# Altium PCB PCB_SIM7670G.PcbDoc
Units mm, origin at the board's own origin, x right, y up, seen from the top; angles counter-clockwise.
Board outline 33 x 41 mm, 2 copper layers (Top Layer, Bottom Layer); 37 components, 28 nets, 210 pads, 89 vias.
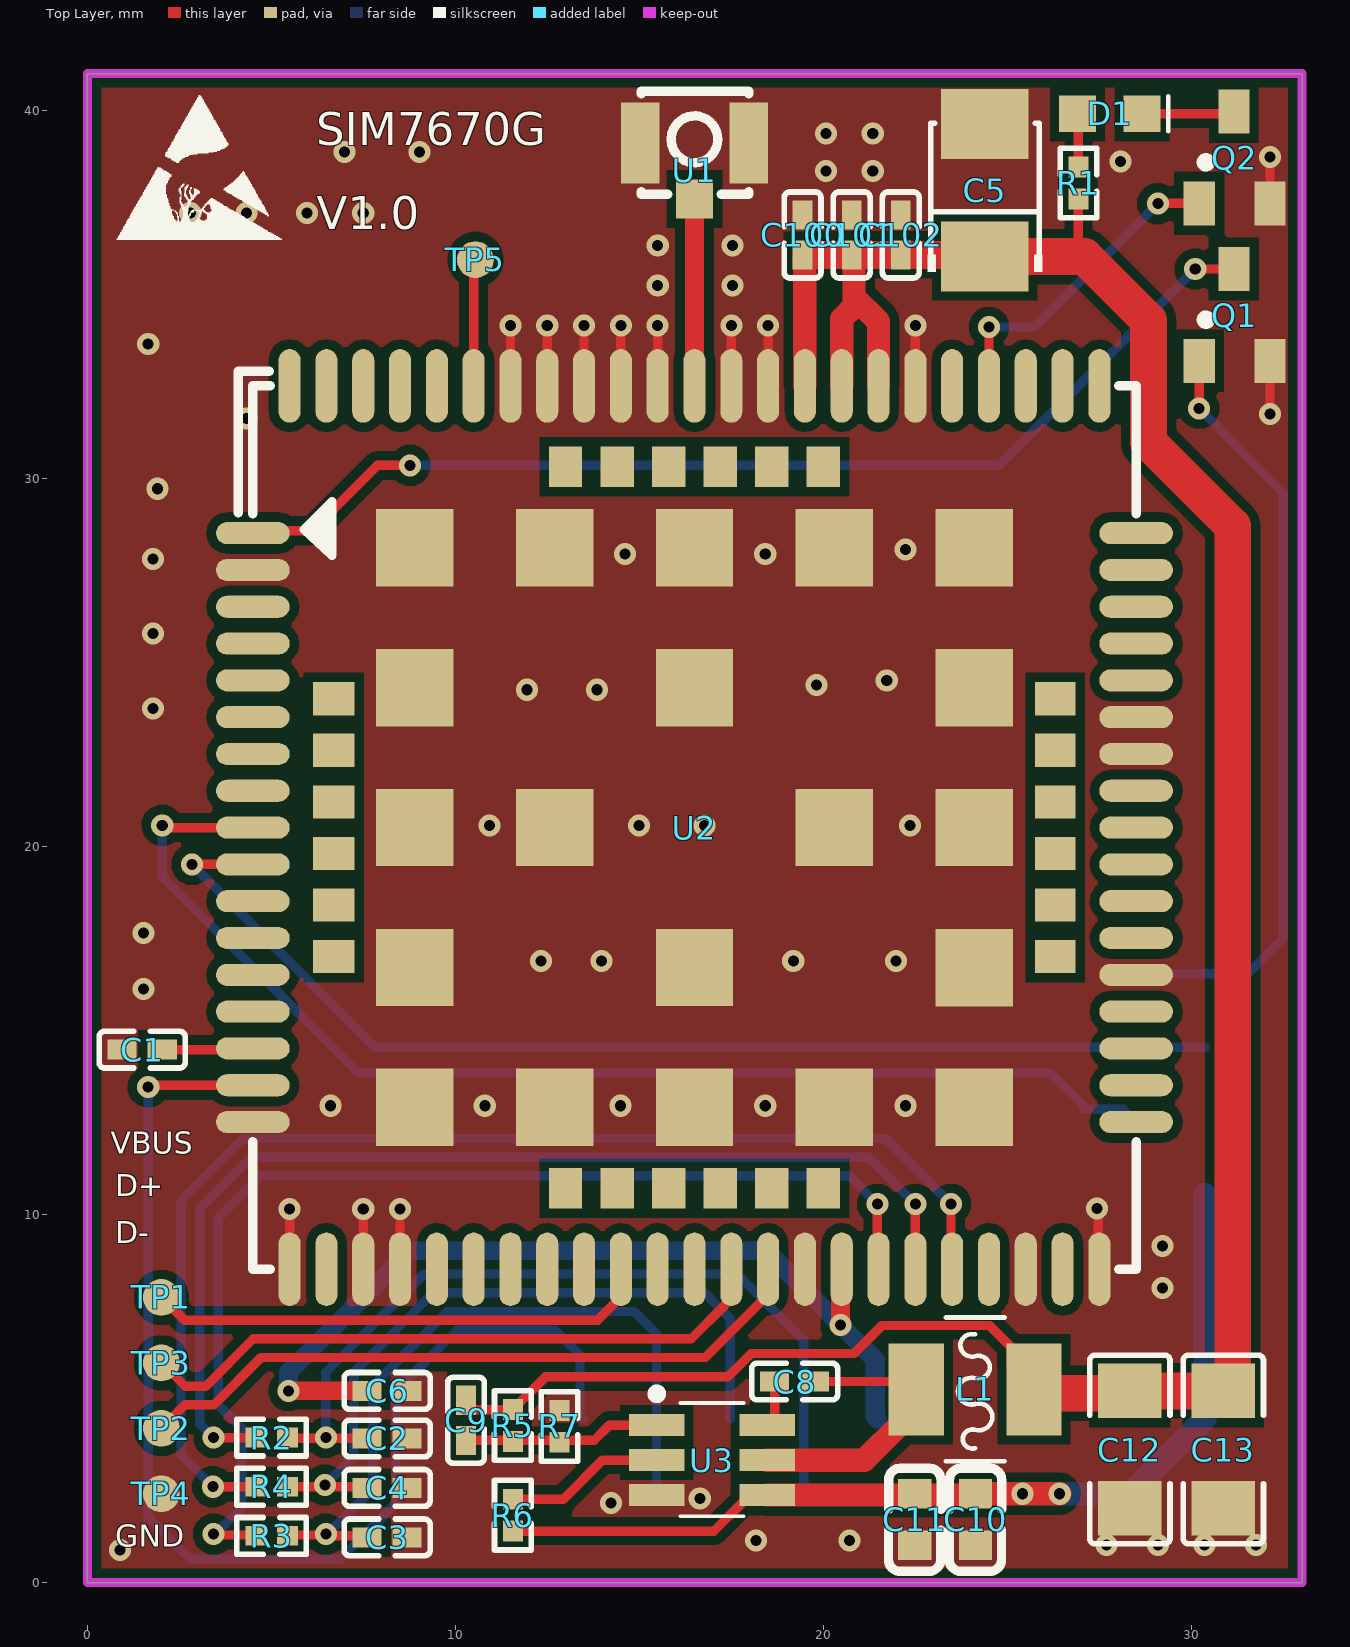
[diagram p0: Top Layer view]
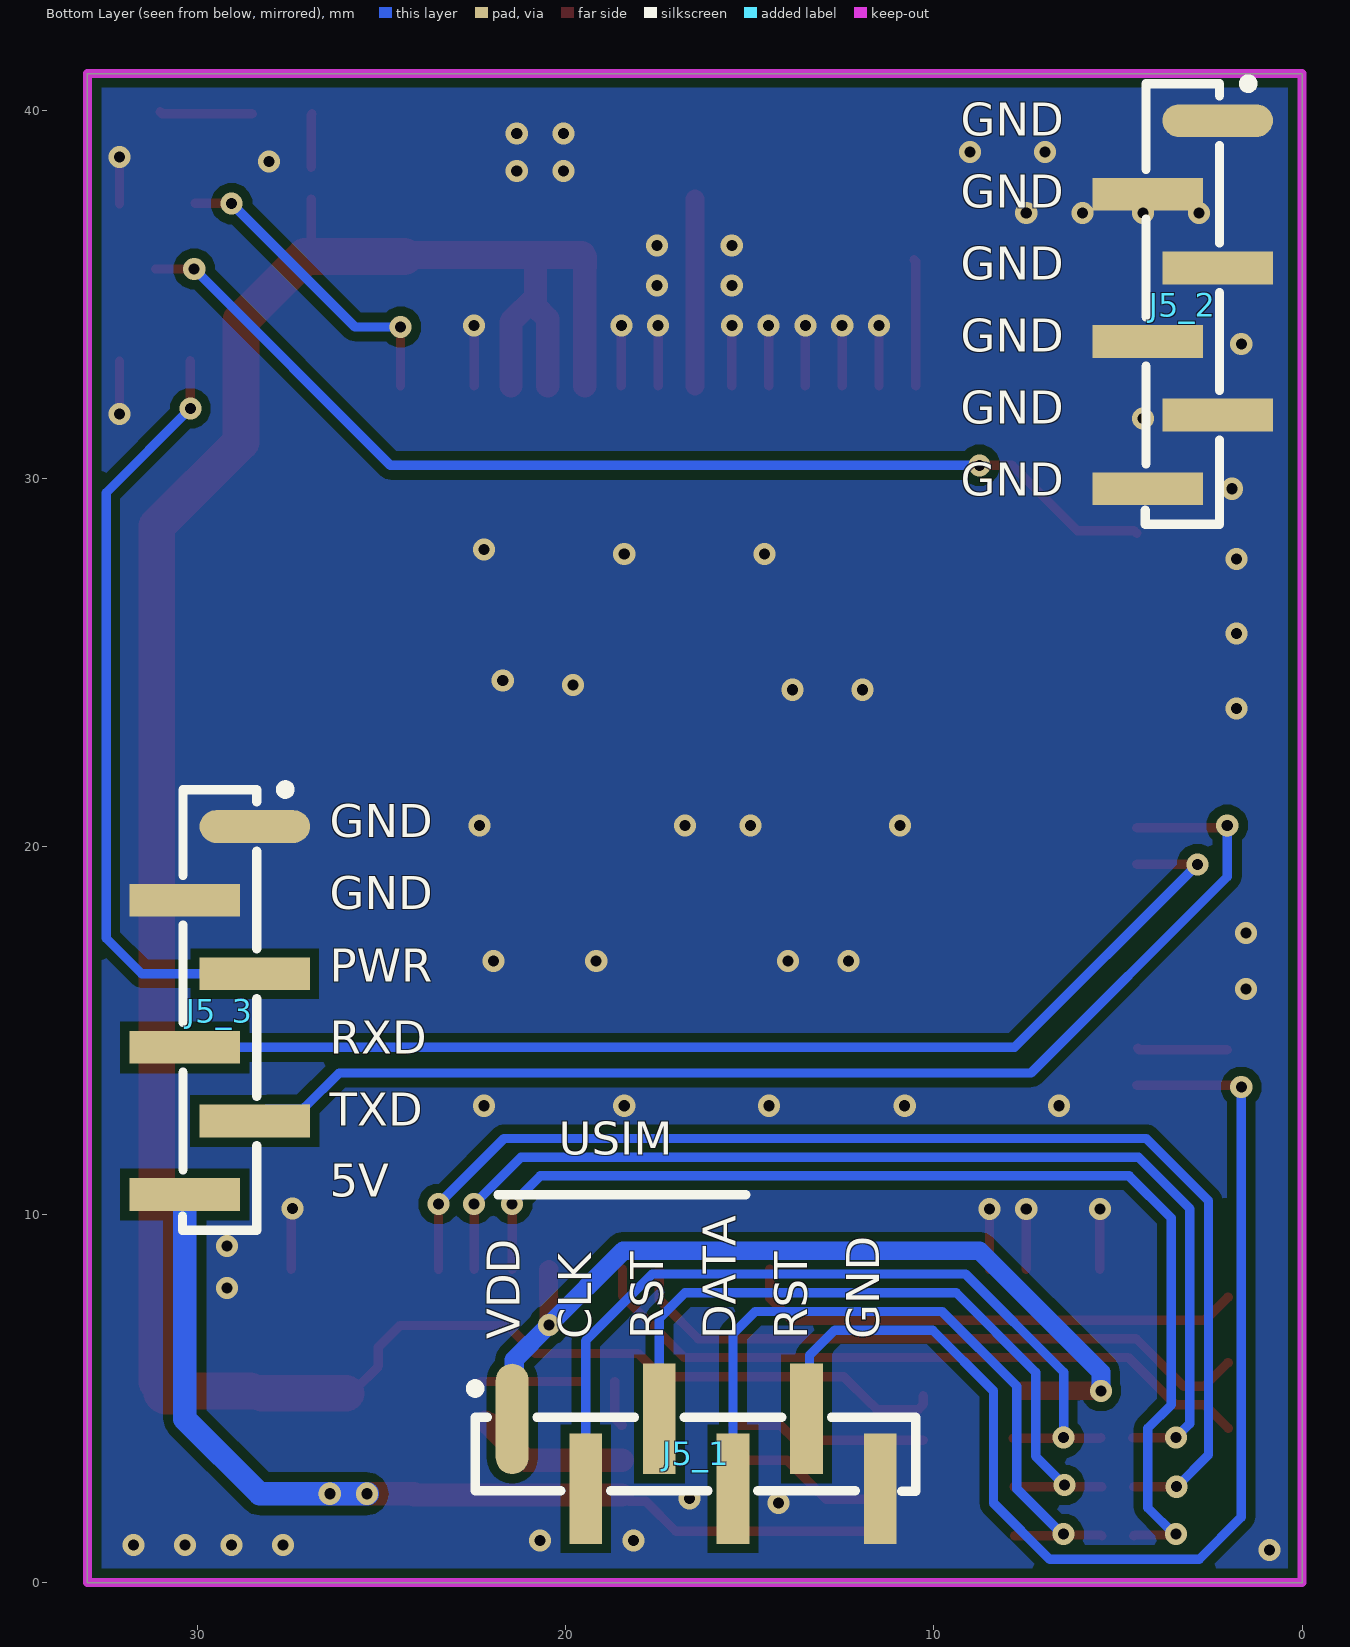
[diagram p1: Bottom Layer view, seen from below]
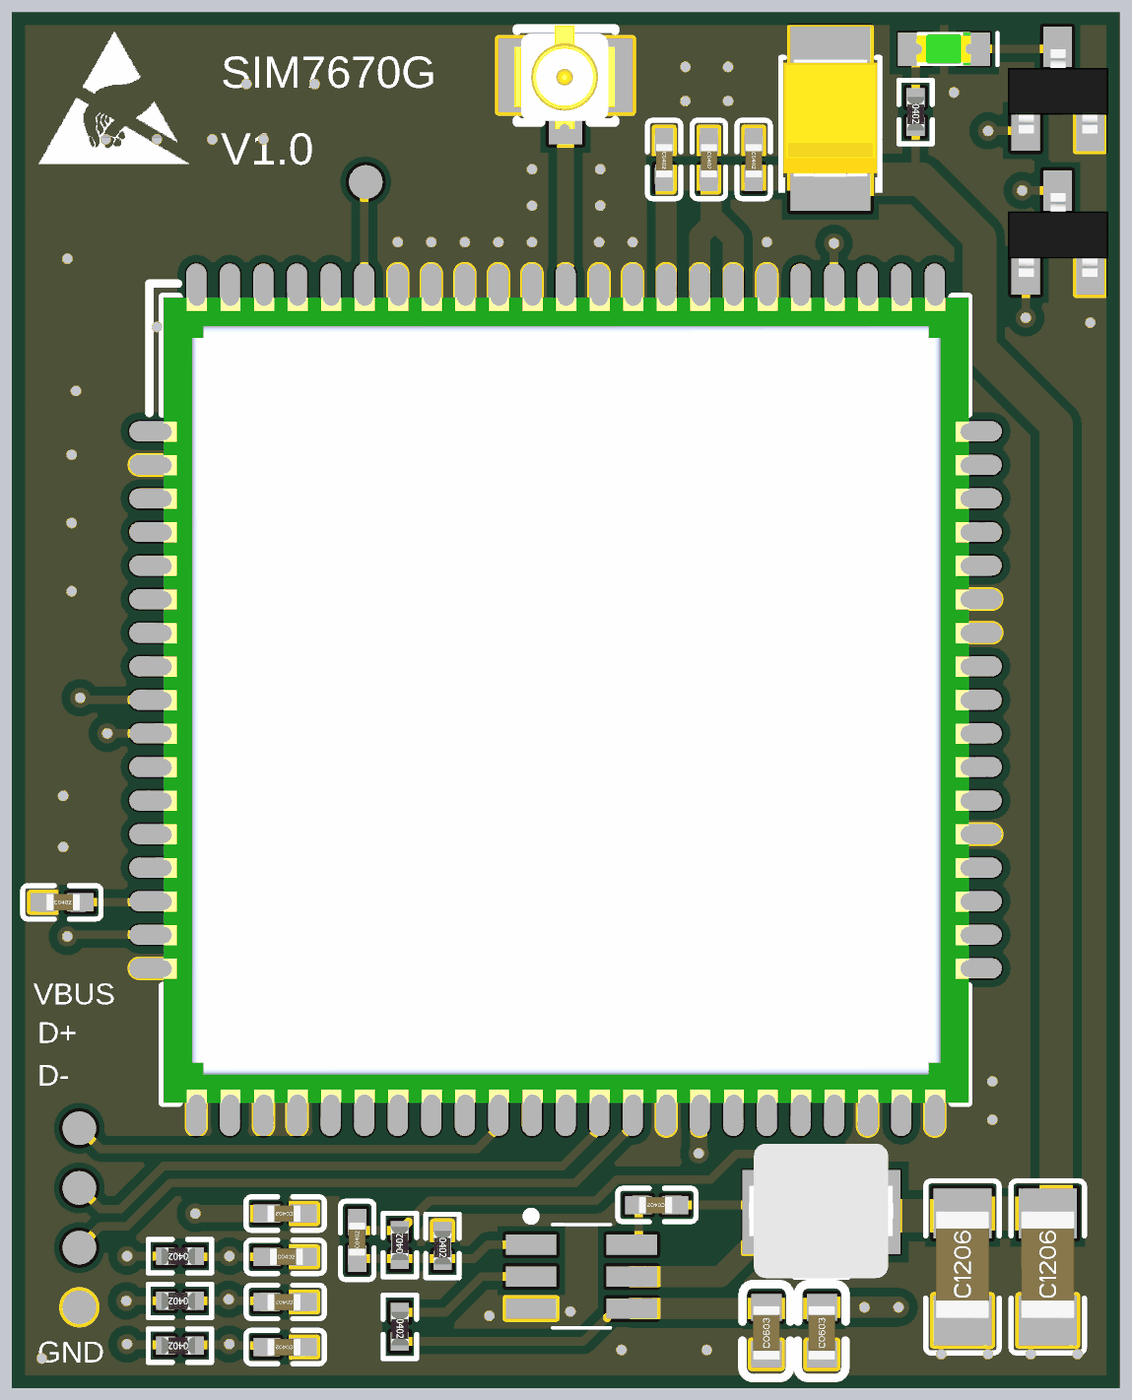
[diagram p2: 3D render of the assembled board from above, using the file's embedded part models]
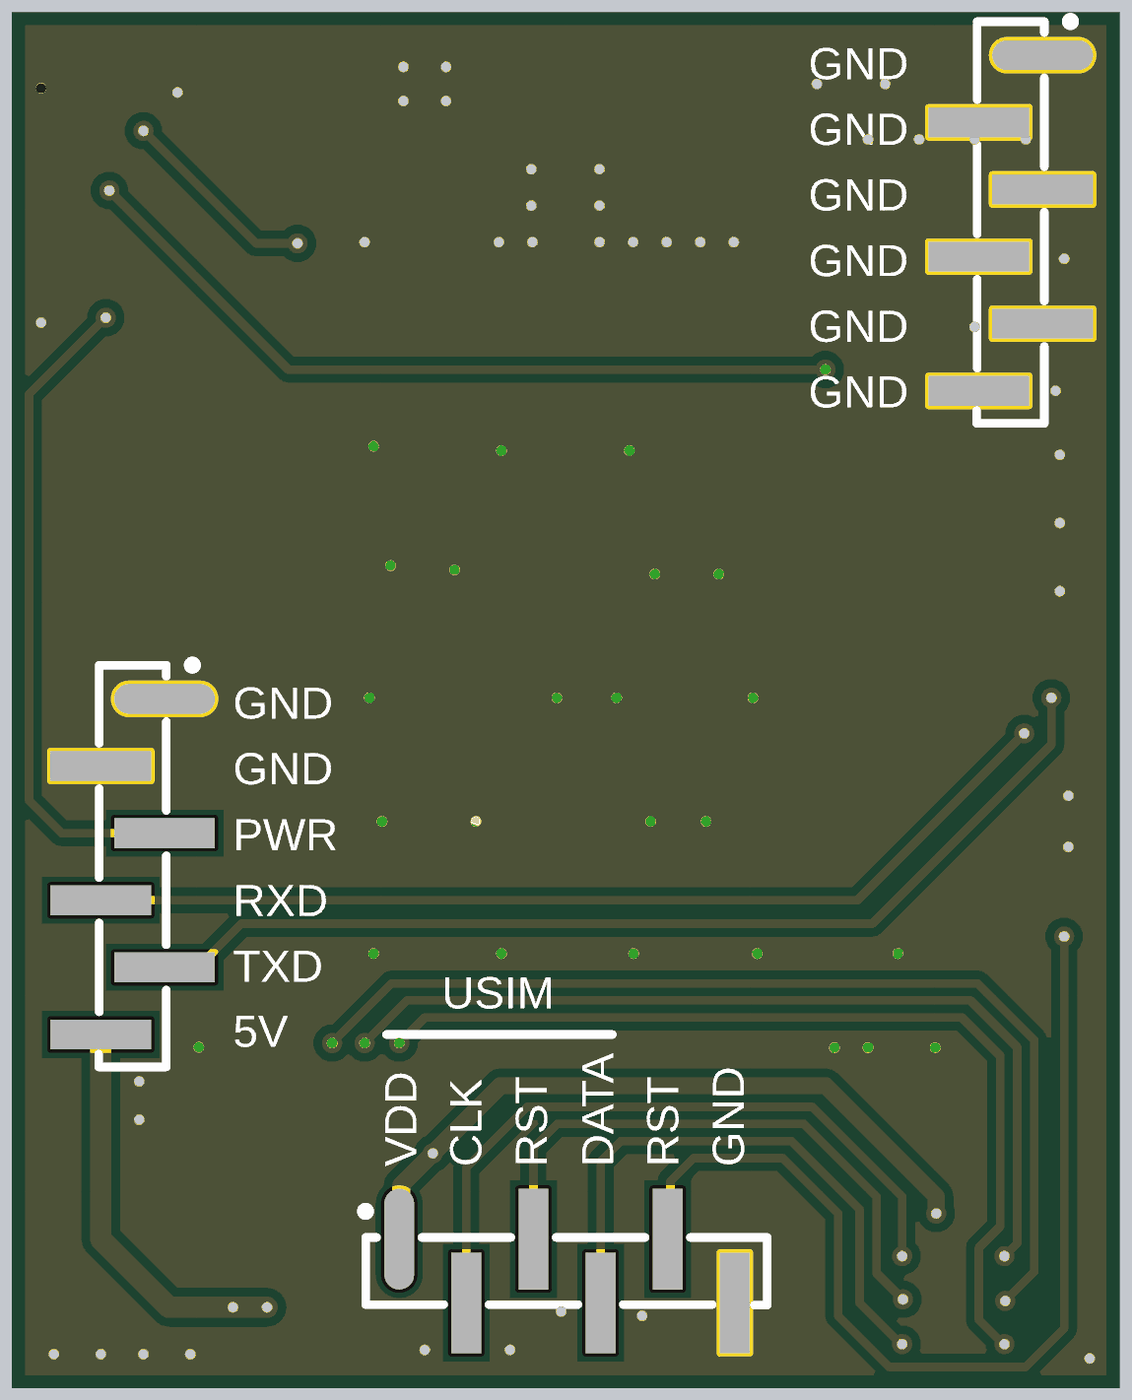
[diagram p3: 3D render of the assembled board from below, using the file's embedded part models]

## Layer stack, top to bottom
Top Solder: solder mask 0.0102, Solder Resist, Dk 3.5
Top Layer: signal copper 0.0356
Dielectric 1: dielectric 0.32, FR-4, Dk 4.8
Bottom Layer: signal copper 0.0356
Bottom Solder: solder mask 0.0102, Solder Resist, Dk 3.5

## Board outline
0,0 0,41 33,41 33,0

## Design rules (kind name [scope] priority, off if disabled: settings)
Clearance [All] p1: gap=0.254 ignorepadtopadclearanceinfootprint=FALSE except(0: Arc-Hole Track-Hole SMDPad-Hole THPad-Hole Via-Hole Fill-Hole Poly-Hole Region-Hole Text-Hole)
PolygonConnect [All] p1: connectstyle=Direct reliefconductorwidth=0.254 reliefentries=4 polygonreliefangle="90 Angle" airgapwidth=0.254
RoutingVias [All] p1: holewidth=0.3 width=0.6 viastyle="Through Hole" minholewidth=0.3 minwidth=0.6 maxholewidth=0.3 maxwidth=0.6
SolderMaskExpansion [All] p1: expansion=0.102 istentingtop=FALSE
Width [All] p1: maxlimit=1.27 minlimit=0.254 preferedwidth=0.635 minimp=50.000000 maximp=50.000000 favimp=50.000000
30 further rules are at their usual default settings.

## Components (designator, comment, footprint, x,y, rotation, side; value= is the part's Value field where it differs from the comment)
C1 "100nF" "CAP CERAMIC SMD 0402 TyPE 1005" 1.524,14.478 r0 top
C2 "22pF" "CAP CERAMIC SMD 0402 TyPE 1005" 8.179,3.916 r0 top
C3 "22pF" "CAP CERAMIC SMD 0402 TyPE 1005" 8.105,1.228 r180 top
C4 "22pF" "CAP CERAMIC SMD 0402 TyPE 1005" 8.105,2.572 r180 top
C5 "100uF 10V" "CAP TANTALUM SMD 3528-21 type B" 24.384,38.1 r90 top
C6 "100nF" "CAP CERAMIC SMD 0402 TyPE 1005" 8.105,5.207 r180 top
C8 "100nF" "CAP CERAMIC SMD 0402 TyPE 1005" 19.177,5.461 r180 top
C9 "100pF" "CAP CERAMIC SMD 0402 TyPE 1005" 10.287,4.445 r90 top
C10 "22uF/16V" "CAP CERAMIC SMD 0603 TyPE 1608" 24.13,1.778 r90 top
C11 "22uF/16V" "CAP CERAMIC SMD 0603 TyPE 1608" 22.479,1.778 r90 top
C12 "100uF/6.3V" "CAP CERAMIC SMD 1206 TyPE 3216" 28.321,3.683 r90 top
C13 "100uF/6.3V" "CAP CERAMIC SMD 1206 TyPE 3216" 30.861,3.683 r90 top
C100 "10pF" "CAP CERAMIC SMD 0402 TyPE 1005" 19.431,36.576 r270 top
C101 "33pF" "CAP CERAMIC SMD 0402 TyPE 1005" 20.764,36.576 r270 top
C102 "100nF" "CAP CERAMIC SMD 0402 TyPE 1005" 22.098,36.576 r270 top
D1 "LED" "LED SMD GREEN TYPE 0603" 27.813,39.878 r0 top
J5_1 "GSM_Connect" "CONNECTORS FEMALE HEADERS 1X6 2.0 TYPE STRAIGHT SMD" 13.486,-2.235 r90 bottom locked
J5_2 "GSM_Connect" "CONNECTORS FEMALE HEADERS 1X6 2.0 TYPE STRAIGHT SMD" 8.971,31.743 r180 bottom locked
J5_3 "GSM_Connect" "CONNECTORS FEMALE HEADERS 1X6 2.0 TYPE STRAIGHT SMD" 35.133,12.565 r180 bottom locked
L1 "4.7uH  0420" "INDUCTORS SMD 0420" 24.13,5.08 r0 top
Q1 "DTC143ZCA" SOT-23 32.162,33.111 r0 top
Q2 "DTC143ZCA" SOT-23 32.162,37.389 r0 top
R1 "5.6K" "RES CHIPS SMD 0402 TYPE 1005" 26.924,37.973 r270 top
R2 "22R" "RES CHIPS SMD 0402 TYPE 1005" 4.953,3.937 r180 top
R3 "22R" "RES CHIPS SMD 0402 TYPE 1005" 4.953,1.27 r180 top
R4 "22R" "RES CHIPS SMD 0402 TYPE 1005" 4.953,2.603 r180 top
R5 "110K" "RES CHIPS SMD 0402 TYPE 1005" 11.557,4.318 r90 top
R6 "10K" "RES CHIPS SMD 0402 TYPE 1005" 11.557,1.778 r270 top
R7 "18K" "RES CHIPS SMD 0402 TYPE 1005" 12.827,4.191 r270 top
TP1 "" "TEST POINT 4" 2.032,7.747 r90 top
TP2 "" "TEST POINT 4" 2.032,4.191 r90 top
TP3 "" "TEST POINT 4" 2.032,5.969 r90 top
TP4 "" "TEST POINT 4" 2.032,2.413 r90 top
TP5 "" "TEST POINT 4" 10.566,35.941 r90 top
U1 "" "CONNECTORS RF SMD TYPE IPEX" 16.517,39.218 r180 top
U2 "A7670G-LABE" "Modules SIM7670G" 15.914,20.085 r0 top locked
U3 "SY8105IADC" SOT-23-6 16.891,3.302 r0 top

## Footprints (in the part's own frame and the unit in brackets; to place one, negate y for a bottom-side part, rotate by r counter-clockwise, add the part's x,y. Pads: shape width x height; smd on the part's side, far side on the other; paste and mask are expansions set on the pad)
"CAP CERAMIC SMD 0402 TyPE 1005" [mm]
  rect 0.79x0.54 smd: 1(-0.582,0) 2(0.508,0)
  silkscreen extent -1.21,-0.5 1.13,0.5, body extent -0.5,-0.25 0.5,0.25, height 0.5
"CAP CERAMIC SMD 0603 TyPE 1608" [mm]
  rect 0.8x0.9 smd: 1(-0.765,0) 2(0.635,0)
  silkscreen extent -1.47,-0.71 1.33,0.72, body extent -0.93,-0.4 0.67,0.4, height 0.8
"CAP CERAMIC SMD 1206 TyPE 3216" [mm]
  rect 1.485x1.728 smd: 1(-1.661,0) 2(1.524,0)
  silkscreen extent -2.63,-1.09 2.5,1.09, body extent -1.6,-0.8 1.6,0.8, height 1.27
"CAP TANTALUM SMD 3528-21 type B" [mm]
  rect 1.9x2.376 smd: 1(-2.073,0) 2(1.524,0)
  silkscreen extent -2.48,-1.55 1.55,1.55, body extent -2,-1.4 1.5,1.4, height 1.91
"CONNECTORS FEMALE HEADERS 1X6 2.0 TYPE STRAIGHT SMD" [mm]
  oval 3x0.89 smd: 1(6.68,7.976)
  rect 3x0.89 smd: 2(4.78,5.976) 3(6.68,3.976) 4(4.78,1.976) 5(6.68,-0.024) 6(4.78,-2.024)
  silkscreen extent 4.71,-2.99 7.64,9.11, body extent 2.94,-3.01 8.44,8.99, height 4
"CONNECTORS RF SMD TYPE IPEX" [mm]
  rect 1x1.05 smd: 1(0.024,1.627)
  rect 1.05x2.2 smd: 2(-1.451,0.102) 3(1.499,0.102)
  silkscreen extent -1.45,-1.3 1.47,1.5, body extent -1.45,-1.4 1.55,1.7, height 1.25
"INDUCTORS SMD 0420" [mm]
  rect 1.5x2.5 smd paste+0 mask+0.051: 1(-1.612,0.17) 2(1.588,0.17)
  silkscreen extent -0.81,-1.78 0.79,2.12, body extent -2.18,-1.8 2.12,2.2, height 2.2
"LED SMD GREEN TYPE 0603" [mil]
  rect 39.3x39.3 smd paste+0 mask+2: 1(-36,1) 2(33,1)
  silkscreen extent 61,-18 61,20, body extent -34,-19 30,21, height 38
"Modules SIM7670G" [mm]
  oval 2x0.6 smd paste-100 mask+0.05: 1(-11.421,8.427) 2(-11.421,7.427) 3(-11.421,6.427) 4(-11.421,5.427) 5(-11.421,4.427) 6(-11.421,3.427) 7(-11.421,2.427) 8(-11.421,1.427) 9(-11.421,0.427) 10(-11.421,-0.573) 11(-11.421,-1.573) 12(-11.421,-2.573) 13(-11.421,-3.573) 14(-11.421,-4.573) 15(-11.421,-5.573) 16(-11.421,-6.573) 17(-11.421,-7.573) 35(12.579,-7.573) 36(12.579,-6.573) 37(12.579,-5.573) 38(12.579,-4.573) 39(12.579,-3.573) 40(12.579,-2.573) 41(12.579,-1.573) 42(12.579,-0.573) 43(12.579,0.427) 44(12.579,1.427) 45(12.579,2.427) 46(12.579,3.427) 47(12.579,4.427) 48(12.579,5.427) 49(12.579,6.427) 50(12.579,7.427) 51(12.579,8.427)
  oval 0.6x2 smd paste-100 mask+0.05: 18(-7.421,-11.573) 19(-6.421,-11.573) 20(-5.421,-11.573) 21(-4.421,-11.573) 22(-3.421,-11.573) 23(-2.421,-11.573) 24(-1.421,-11.573) 25(-0.421,-11.573) 26(0.579,-11.573) 27(1.579,-11.573) 28(2.579,-11.573) 29(3.579,-11.573) 30(4.579,-11.573) 31(5.579,-11.573) 32(6.579,-11.573) 33(7.579,-11.573) 34(8.579,-11.573) 52(8.579,12.427) 53(7.579,12.427) 54(6.579,12.427) 55(5.579,12.427) 56(4.579,12.427) 57(3.579,12.427) 58(2.579,12.427) 59(1.579,12.427) 60(0.579,12.427) 61(-0.421,12.427) 62(-1.421,12.427) 63(-2.421,12.427) 64(-3.421,12.427) 65(-4.421,12.427) 66(-5.421,12.427) 67(-6.421,12.427) 68(-7.421,12.427) 89(-10.421,-11.573) 90(-9.421,-11.573) 91(-8.421,-11.573) 92(9.579,-11.573) 93(10.579,-11.573) 94(11.579,-11.573) 95(11.579,12.427) 96(10.579,12.427) 97(9.579,12.427) 98(-8.421,12.427) 99(-9.421,12.427) 100(-10.421,12.427)
  rect 2.1x2.1 smd paste-100 mask+0.05: 69(-7.021,8.027) 70(-7.021,4.227) 71(-7.021,0.427) 72(-7.021,-3.373) 73(-7.021,-7.173) 74(-3.221,-7.173) 75(0.579,-7.173) 76(4.379,-7.173) 77(8.179,-7.173) 78(8.179,-3.383) 79(8.179,0.427) 80(8.179,4.227) 81(8.179,8.027) 82(4.379,8.027) 83(0.579,8.027) 84(-3.221,8.027) 85(-3.221,0.427) 86(0.579,-3.373) 87(4.379,0.427) 88(0.579,4.227)
  rect 1.12x0.9 smd paste-100 mask+0.05: 101(-9.221,3.927) 102(-9.221,2.527) 103(-9.221,1.127) 104(-9.221,-0.273) 105(-9.221,-1.673) 106(-9.221,-3.073)
  rect 0.9x1.1 smd paste-100 mask+0.05: 107(-2.92,-9.373) 108(-1.521,-9.373) 109(-0.121,-9.373) 110(1.279,-9.373) 111(2.679,-9.373) 112(4.079,-9.373) 119(4.079,10.227) 120(2.679,10.227) 121(1.279,10.227) 122(-0.121,10.227) 123(-1.521,10.227) 124(-2.92,10.227)
  rect 1.1x0.9 smd paste-100 mask+0.05: 113(10.379,-3.073) 114(10.379,-1.673) 115(10.379,-0.273) 116(10.379,1.127) 117(10.379,2.527) 118(10.379,3.927)
  silkscreen extent -11.82,-11.57 12.58,12.83, body extent -11.4,-11.58 12.6,12.42, height 2.6
"RES CHIPS SMD 0402 TYPE 1005" [mm]
  rect 0.566x0.54 smd: 1(-0.485,0) 2(0.381,0)
  silkscreen extent -1,-0.5 0.89,0.5, body extent -0.5,-0.25 0.5,0.25, height 0.36
SOT-23 [mm]
  rect 0.85x1.2 smd: 1(-1.956,0.082) 2(-0.031,0.076) 3(-1.011,2.576)
  silkscreen extent -1.9,1.07 -1.65,1.32, body extent -2.49,0 0.51,2.5, height 1.06
SOT-23-6 [mm]
  rect 1.5x0.6 smd: 1(-1.424,0.975) 2(-1.424,0.025) 3(-1.424,-0.925) 4(1.576,-0.925) 5(1.576,0.025) 6(1.576,0.975)
  silkscreen extent -1.55,-1.5 0.94,1.95, body extent -1.68,-1.5 1.83,1.55, height 1.45
"TEST POINT 4" [mm]
  round 1 smd: 0(0,0.025)

## Part data
C1 C2 C3 C4 C6 C8 C9 C10 C11 C12 C13 C100 C101 C102: library part CAP104-100nF-50V, "Capacitor", 104=100nF
C5: library part "CAP ALU HOLD", "Aluminum Electrolytic Capacitors - Leaded ROHS", BOM_JLCPCB Part Class="Extended Part", BOM_Manufacturer=AISHI(艾华集团), BOM_Manufacturer Part=ERR1VM102G20OT, BOM_Supplier=LCSC, BOM_Supplier Part=C398835, Contributor=LCSC, nameAlias=Capacitance, spicePre=C, spiceSymbolName=ERR1VM102G20OT
D1: library part "LED SMD 0805", "Emerald 0805 Light Emitting Diodes (LED) ROHS", Supplier 1=RSComponents
J5_1 J5_2 J5_3: library part "JP 1x6 2.54 Duc Thang", "Cắm", Chung_Loai=Cắm, Don_Vi=Con, Ma_Hang=MH000903, Ten_Linh_Kien="Jump Đơn Đực 2.54MM 1x40P Thẳng 11MM"
L1: library part "INDUCTORS SMD", BOM_JLCPCB Part Class="Extended Part", BOM_Manufacturer=Yanchuang(研创), BOM_Manufacturer Part=SCHF160808H47NJT, BOM_Supplier=LCSC, BOM_Supplier Part=C578001, Contributor=LCSC, nameAlias=Inductance, spicePre=L, spiceSymbolName=SCHF160808H47NJT
Q1 Q2: library part "TRANSISTOR SMD NPN", "SOT-23 Bipolar Transistors npn - BJT ROHS", BOM_Manufacturer=晶扬电子, BOM_Manufacturer Part=MMBT3904, BOM_Supplier=LCSC, BOM_Supplier Part=C5156716, Contributor=lcsc, link=https://atta.szlcsc.com/upload/public/pdf/source/20220916/F7F78DEEB551E1B14C8EDDE9CBB3CED9.pdf, spicePre=Q, spiceSymbolName=MMBT3904_C5156716
R1 R2 R3 R4 R5 R6 R7: library part "RES 0603 1%_", "±1% - Chip Resistor - Surface Mount ROHS", Chung_Loai=Dán, Don_Vi=Con, Ma_Hang=MH005880, So_Chan=2
TP1 TP2 TP3 TP4 TP5: library part "TEST POINT", "Test Point", Solder=NF
U1: library part "CONNECTORS RF SMD", "SMD RF Connectors / Coaxial Connectors ROHS", BOM_JLCPCB Part Class="Extended Part", BOM_Manufacturer="SHOU HAN(首韩)", BOM_Manufacturer Part="IPEX1-TXZ 142", BOM_Supplier=LCSC, BOM_Supplier Part=C3151745, Contributor=lcsc, link=https://atta.szlcsc.com/upload/public/pdf/source/20220627/A0C2EF411B6F3EC53ED1A4F491E26EB6.pdf, spicePre=U, spiceSymbolName="IPEX1-TXZ 142"
U2: library part "MODULES SIM A7670G-LABE", JLCPCB Part Class="Extended Part", Manufacturer=SIMCOM(芯讯通无线科技), Add into BOM=yes, Convert to PCB=yes, Datasheet=https://atta.szlcsc.com/upload/public/pdf/source/20240607/B50C584620D03E126C7F7E827627A461.pdf, Device=A7670G-LABE, LCSC Part Name=A7670G-LABE, Manufacturer Part=A7670G-LABE, Supplier=LCSC, Supplier Footprint=SMD,24x24mm, Supplier Part=C22462360, Symbol=A7670G-LABE
U3: Input Voltage=4.5V~18V, JLCPCB Part Class="Extended Part", LCSC Part Name="高效率快速响应5.0A 18V输入同步降压调节器", Manufacturer=silergy(矽力杰), Operating Temperature=-40℃~+125℃, Output Current=-, Quiescent Current (Iq)=250uA, Switching Frequency=500kHz, Add into BOM=yes, Convert to PCB=yes, Datasheet=https://atta.szlcsc.com/upload/public/pdf/source/20220309/7BF3C8E5C307C2252A511902A6824332.pdf, Device=SY8105IADC, Function="Step-down type", Manufacturer Part=SY8105IADC, Number of Outputs=1, Output Type=-, Output Voltage=-, Supplier=LCSC, Supplier Footprint=TSOT-23-6, Supplier Part=C2981547, Switch tube (built-in/external)=Built-in, Symbol=SY8105IADC, Synchronous Rectification=Yes, Topology=Step-down

## Via types
v1: diameter 0.6, hole 0.3, Top Layer to Bottom Layer, tented both sides, 89 vias

## Nets (pads, with @x,y where several pads share a name; then routed paths per layer and width w, separated by ;. In a path a pad name is that pad's centre, name@x,y a point inside that pad or via, vN(x,y) a via of type N, cw(c..) or ccw(c..) an arc to the next point about the centre after c; other vN are vias at no path point)
5VDC: C10.2 C11.2 J5_3.6 R6.2 U3.4 | length 27.2
  Top Layer w0.254: R6.2 17.018,1.397 17.825,2.204 18.294,2.204 U3.4
  Top Layer w0.635: U3.4 C10.2@24.13,2.377 ; C10.2 v1(25.4,2.413) v1(26.416,2.413)
  Bottom Layer w0.635: v1(25.4,2.413) v1(26.416,2.413) 28.321,2.413 30.353,4.445 J5_3.6
GND: C1.1 C2.2 C3.1 C4.1 C5.2 C6.1 C10.1 C11.1 C12.1 C13.1 C100.1 C101.1 C102.1 J5_1.6 J5_2.1 J5_2.2 J5_2.3 J5_2.4 J5_2.5 J5_2.6 J5_3.1 J5_3.2 Q1.2 Q2.2 R7.1 TP4.0 U1.2 U1.3 U2.2 U2.17 U2.18 U2.29 U2.39 U2.45 U2.46 U2.54 U2.58 U2.59 U2.61 U2.62 U2.63 U2.64 U2.65 U2.69 U2.70 U2.71 U2.72 U2.73 U2.74 U2.75 U2.76 U2.77 U2.78 U2.79 U2.80 U2.81 U2.82 U2.83 U2.84 U2.85 U2.86 U2.87 U2.88 U2.89 U2.91 U2.92 U2.94 U3.3 | length 21.7
  Top Layer w0.254: U2.89 v1(5.493,10.149) ; U2.91 v1(7.493,10.149) ; U2.18 v1(8.493,10.149) ; v1@11.43,34.212 v1(11.493,34.149) U2.65 ; U2.64 v1@12.493,33.989 ; U2.63 v1@13.493,33.878 ; U2.62 v1@14.493,34.021 ; U2.61 v1@15.493,34.035 ; U2.59 v1@17.493,34.13 ; U2.58 v1@18.493,34.085 ; U2.54 v1(22.493,34.149) ; v1(27.432,10.16) 27.461,10.131 U2.94@27.461,8.512 ; v1(32.131,31.75) Q1.2 ; Q2.2 v1(32.131,38.735)
  other v1: 0.889,0.889 27.686,1.016 29.083,1.016 30.353,1.016 31.75,1.016 18.161,1.143 20.701,1.143 14.224,2.159 16.637,2.286 29.21,8.001 29.21,9.144 6.604,12.954 10.795,12.954 14.478,12.954 18.415,12.954 22.225,12.954 1.524,16.129 12.319,16.891 13.97,16.891 19.177,16.891 21.971,16.891 1.524,17.653 10.922,20.574 14.986,20.574 16.764,20.574 22.352,20.574 1.778,23.749 11.938,24.257 13.843,24.257 19.812,24.384 21.717,24.511 1.778,25.781 1.778,27.813 14.605,27.94 18.415,27.94 22.225,28.067 1.905,29.718 4.318,31.623 1.651,33.655 12.493,34.149 13.493,34.149 14.493,34.149 15.493,34.149 17.493,34.149 18.493,34.149 15.494,35.236 17.526,35.236 15.494,36.322 17.526,36.322 2.794,37.211 4.318,37.211 5.969,37.211 7.493,37.211 20.066,38.354 21.336,38.354 28.067,38.608 6.985,38.862 9.017,38.862 20.066,39.37 21.336,39.37
IO27_GSM_PWRKEY: J5_3.3 Q1.1 | length 21.1
  Top Layer w0.254: v1(30.206,31.897) Q1.1
  Bottom Layer w0.254: J5_3.3 31.527,16.541 32.492,17.506 32.492,29.611 v1(30.206,31.897)
NetC8_1: C8.1 L1.1 U3.5 | length 7.2
  Top Layer w0.254: C8.1@19.632,5.461 22.306,5.461 L1.1
  Top Layer w0.508: L1.1@22.085,4.305 22.085,4.317 22.186,4.417 L1.1@22.197,4.417
  Top Layer w0.635: U3.5 21.107,3.327 L1.1@22.085,4.305
NetC8_2: C8.2 U3.6 | length 1.3
  Top Layer w0.254: U3.6 18.496,4.277 18.669,4.45 C8.2
NetC9_1: C9.1 R5.1 R7.2 U3.1 | length 5.4
  Top Layer w0.254: C9.1 11.557,3.863 12.827,3.863 13.769,3.863 14.183,4.277 U3.1
NetD1_1: D1.1 R1.1 | length 1.5
  Top Layer w0.254: D1.1 26.924,39.878 R1.1
NetD1_2: D1.2 Q2.3 | length 2.5
  Top Layer w0.254: D1.2@28.524,39.903 30.962,39.903 Q2.3@31.024,39.965
NetR6_1: R6.1 U3.2 | length 4.4
  Top Layer w0.254: R6.1 12.931,2.263 13.995,3.327 U3.2
NetU1_1: U1.1 U2.60 | length 5.1
  Top Layer w0.508: U2.60 U1.1
"SIM NETLIGHT": Q2.1 U2.52 | length 8.6
  Top Layer w0.254: U2.52 v1(24.493,34.113) ; v1(29.083,37.465) 29.088,37.47 Q2.1@30.079,37.47
  Bottom Layer w0.254: v1(24.493,34.113) 25.731,34.113 v1(29.083,37.465)
"SIM PWRKEY": Q1.3 U2.1 | length 29.6
  Top Layer w0.254: U2.1 4.559,28.578 6.099,28.578 7.874,30.353 v1(8.763,30.353) ; v1(30.099,35.687) Q1.3
  Bottom Layer w0.254: v1(8.763,30.353) 24.765,30.353 v1(30.099,35.687)
"SIM RESET": J5_1.5 U2.16 | length 33.2
  Top Layer w0.254: v1(1.651,13.462) 1.701,13.512 U2.16
  Bottom Layer w0.254: v1(1.651,13.462) 1.651,1.778 2.794,0.635 6.858,0.635 8.382,2.159 8.382,5.207 10.033,6.858 12.7,6.858 13.381,6.177 13.381,4.526 J5_1.5
"SIM RXD": J5_3.4 U2.10 | length 31.2
  Top Layer w0.254: v1(2.84,19.512) U2.10
  Bottom Layer w0.254: v1(2.84,19.512) 7.811,14.541 J5_3.4
"SIM STATUS": TP5.0 U2.66 | length 3.4
  Top Layer w0.254: U2.66 10.493,35.893 TP5.0
"SIM TXD": J5_3.5 U2.9 | length 33.1
  Top Layer w0.254: v1(2.032,20.574) 2.094,20.512 U2.9
  Bottom Layer w0.254: v1(2.032,20.574) 2.032,19.177 7.366,13.843 26.162,13.843 27.08,12.925 27.08,12.859 28.135,12.859 J5_3.5
"SIM VDD EXIT": C1.2 U2.15 | length 2.4
  Top Layer w0.254: C1.2 4.427,14.478 U2.15@4.461,14.512
SIM_CLK: C2.1 J5_1.2 R2.1 | length 23.1
  Top Layer w0.254: R2.1@5.461,3.937 5.482,3.916 6.456,3.916 v1(6.477,3.937) 6.498,3.916 C2.1 C2.1@7.851,3.916
  Bottom Layer w0.254: v1(6.477,3.937) 6.477,5.715 9.144,8.382 17.653,8.382 19.462,6.573 J5_1.2
SIM_DATA: C3.2 J5_1.4 R3.1 | length 20
  Top Layer w0.254: R3.1 5.461,1.293 6.454,1.293 v1(6.477,1.316) ; v1@6.477,1.27 C3.2@7.808,1.27
  Bottom Layer w0.254: v1(6.477,1.316) 6.523,1.316 7.747,2.54 7.747,5.334 9.779,7.366 14.859,7.366 15.462,6.763 J5_1.4
SIM_RST: C4.2 J5_1.3 R4.1 | length 19.8
  Top Layer w0.254: R4.1 v1@6.408,2.603 ; v1@6.5,2.603 C4.2@7.827,2.603
  Bottom Layer w0.254: v1(6.454,2.649) 6.459,2.649 7.239,3.429 7.239,5.715 9.398,7.874 15.875,7.874 16.764,7.874 17.462,7.176 J5_1.3
USB_DN: TP2.0 U2.28 | length 18.7
  Top Layer w0.254: TP2.0 2.642,4.826 3.429,4.826 4.718,6.115 16.783,6.115 18.461,7.793 U2.28@18.461,8.512
USB_DP: TP3.0 U2.27 | length 17.5
  Top Layer w0.254: TP3.0 2.02,5.969 2.655,5.334 3.219,5.334 4.508,6.623 16.402,6.623 17.32,7.541 17.32,7.545 17.461,7.686 U2.27@17.461,8.512
"USIM CLK": R2.2 U2.32 | length 29.8
  Top Layer w0.254: v1(3.429,3.937) R2.2 R2.2@4.595,3.937 ; U2.32 v1@22.493,10.253
  Bottom Layer w0.254: v1(3.429,3.937) 3.048,4.318 3.048,10.16 4.445,11.557 21.221,11.557 v1(22.493,10.285)
"USIM DATA": R3.2 U2.31 | length 30.8
  Top Layer w0.254: v1(3.429,1.316) 3.452,1.293 4.549,1.293 R3.2 ; U2.31@21.461,8.512 v1(21.461,10.285)
  Bottom Layer w0.254: v1(3.429,1.316) 3.475,1.316 4.191,2.032 4.191,4.191 3.556,4.826 3.556,9.906 4.699,11.049 20.697,11.049 v1(21.461,10.285)
"USIM RST": R4.2 U2.33 | length 33.4
  Top Layer w0.254: v1(3.406,2.603) R4.2 ; U2.33@23.461,8.512 v1(23.461,10.285)
  Bottom Layer w0.254: v1(3.406,2.603) 2.54,3.469 2.54,10.37 4.235,12.065 21.681,12.065 v1(23.461,10.285)
"USIM VDD": C6.2 J5_1.1 U2.30 | length 25.9
  Top Layer w0.508: v1(5.461,5.207) C6.2 ; v1(20.461,6.999) 20.461,7.715 20.475,7.729 20.475,8.498 U2.30@20.461,8.512
  Bottom Layer w0.508: v1(5.461,5.207) 5.461,5.715 8.763,9.017 18.443,9.017 v1(20.461,6.999) 21.389,6.071 ; J5_1.1 J5_1.1@21.413,4.494 ; 21.389,6.071 21.413,6.047 J5_1.1@21.413,4.494 ; 21.389,6.071 21.389,4.518 J5_1.1@21.413,4.494
VBAT: C5.1 C9.2 C12.2 C13.2 C100.2 C101.2 C102.2 L1.2 R1.2 R5.2 U2.55 U2.56 U2.57 | length 74.3
  Top Layer w0.254: C9.2@10.287,5.078 C9.2 10.287,4.842 10.43,4.699 R5.2 11.557,4.712 11.7,4.855 11.713,4.855 12.446,5.588 17.399,5.588 18.034,6.223 20.828,6.223 21.59,6.985 24.511,6.985 25.095,6.401 25.095,5.872 L1.2 ; R1.2 26.924,36.195 27.092,36.027 ; C12.2@28.258,5.144 C12.2
  Top Layer w0.635: C100.2@19.478,36.021 19.478,35.737 19.493,35.723 U2.57 ; U2.56 20.493,34.336 20.828,34.671 C101.2@20.828,36.068 ; 20.828,34.925 21.493,34.26 U2.55 ; C5.1@24.343,36.068 C5.1
  Top Layer w0.762: C100.2@19.558,36.068 20.828,36.068 C102.2 C5.1@24.343,36.068
  Top Layer w1: C5.1 27.092,36.027 28.829,34.29 28.829,30.988 31.115,28.702 31.115,5.45 30.872,5.207 C13.2 ; L1.2@25.972,5.144 C12.2@28.258,5.144 ; C12.2@28.575,5.207 C13.2@30.734,5.207
  Top Layer w1.27: C13.2@30.48,5.207 C13.2
VBUS: TP1.0 U2.24 | length 13.7
  Top Layer w0.254: TP1.0 2.021,7.747 2.637,7.131 13.862,7.131 14.461,7.73 U2.24@14.461,8.512
pads on no net: U2.3 U2.4 U2.5 U2.6 U2.7 U2.8 U2.11 U2.12 U2.13 U2.14 U2.19 U2.20 U2.21 U2.22 U2.23 U2.25 U2.26 U2.34 U2.35 U2.36 U2.37 U2.38 U2.40 U2.41 U2.42 U2.43 U2.44 U2.47 U2.48 U2.49 U2.50 U2.51 U2.53 U2.67 U2.68 U2.90 U2.93 U2.95 U2.96 U2.97 U2.98 U2.99 U2.100 U2.101 U2.102 U2.103 U2.104 U2.105 U2.106 U2.107 U2.108 U2.109 U2.110 U2.111 U2.112 U2.113 U2.114 U2.115 U2.116 U2.117 U2.118 U2.119 U2.120 U2.121 U2.122 U2.123 U2.124

## Polygon pours and split planes (outlines as drawn)
GND on Bottom Layer "GND_L02_P001" (solid, remove dead copper, pour order 1): 33.02,41.021 0,41.021 0,0 33.02,0
GND on Top Layer "GND_L01_P000" (solid, remove dead copper, pour order 0): 33.02,41.021 0,41.021 0,0 33.02,0

## Keep-outs
Keep-Out Layer:
  the board outline again, w0.254

## Silkscreen, mask and mechanical layers (free items; w line width, h text height)
Top Overlay:
  drawing of 6 lines, arcs and shapes, not listed
  text "SIM7670G" at 6.223,38.752 h1.52
  text "V1.0" at 6.224,36.466 h1.52
  text "VBUS" at 0.636,11.441 h1.02
  text "D+" at 0.762,10.287 h1.02
  text "D-" at 0.762,9.017 h1.02
  text "GND" at 0.762,0.773 h1.02
Bottom Overlay:
  lines w0.254: 15.113,10.541 21.844,10.541
  text "GND" at 9.271,39.006 h1.52
  text "GND" at 9.271,37.05 h1.52
  text "GND" at 9.271,35.094 h1.52
  text "GND" at 9.271,33.139 h1.52
  text "GND" at 9.271,31.183 h1.52
  text "GND" at 9.271,29.227 h1.52
  text "GND" at 26.416,19.956 h1.52
  text "GND" at 26.416,18 h1.52
  text "PWR" at 26.416,16.027 h1.52
  text "RXD" at 26.416,14.072 h1.52
  text "TXD" at 26.416,12.116 h1.52
  text "USIM" at 20.193,11.32 h1.52
  text "5V" at 26.416,10.177 h1.52
  text "GND" at 11.193,6.604 h1.52 r270
  text "RST" at 13.149,6.604 h1.52 r270
  text "DATA" at 15.088,6.604 h1.52 r270
  text "RST" at 17.06,6.604 h1.52 r270
  text "CLK" at 19.016,6.604 h1.52 r270
  text "VDD" at 20.955,6.605 h1.52 r270
Mechanical 15:
  lines w0.003: 16.013,22.798 16.014,22.798